# Altium PCB WiFi_Module-2-Layers.PcbDoc (part 1 of 2)
Units mil, origin at the board's own origin, x right, y up, seen from the top; angles counter-clockwise.
Board outline 2293.35 x 2499.67 mil, 2 copper layers (Top Layer, Bottom Layer); 66 components, 71 nets, 200 pads, 103 vias.
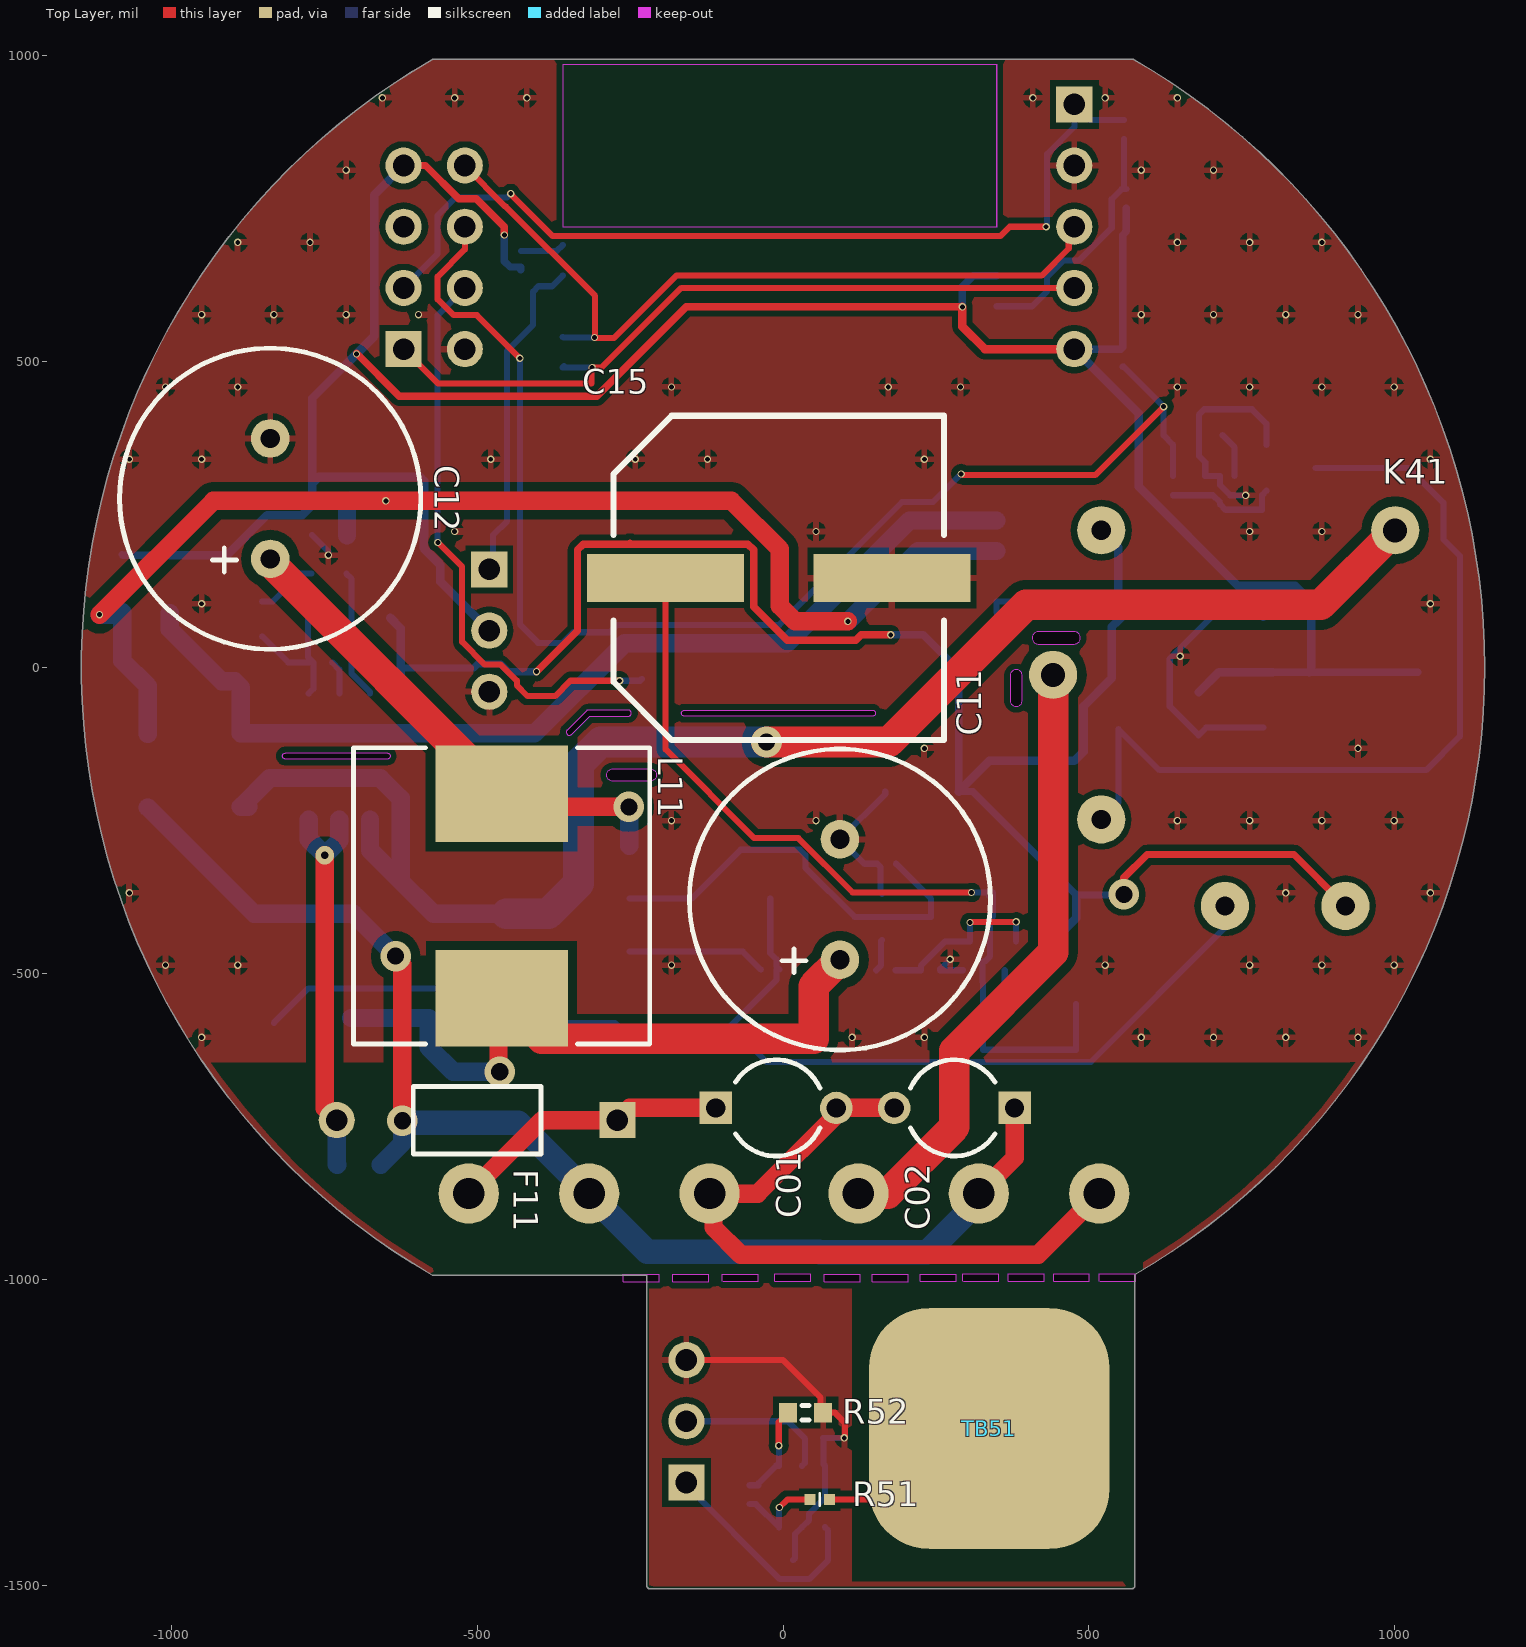
[diagram p0: Top Layer view]
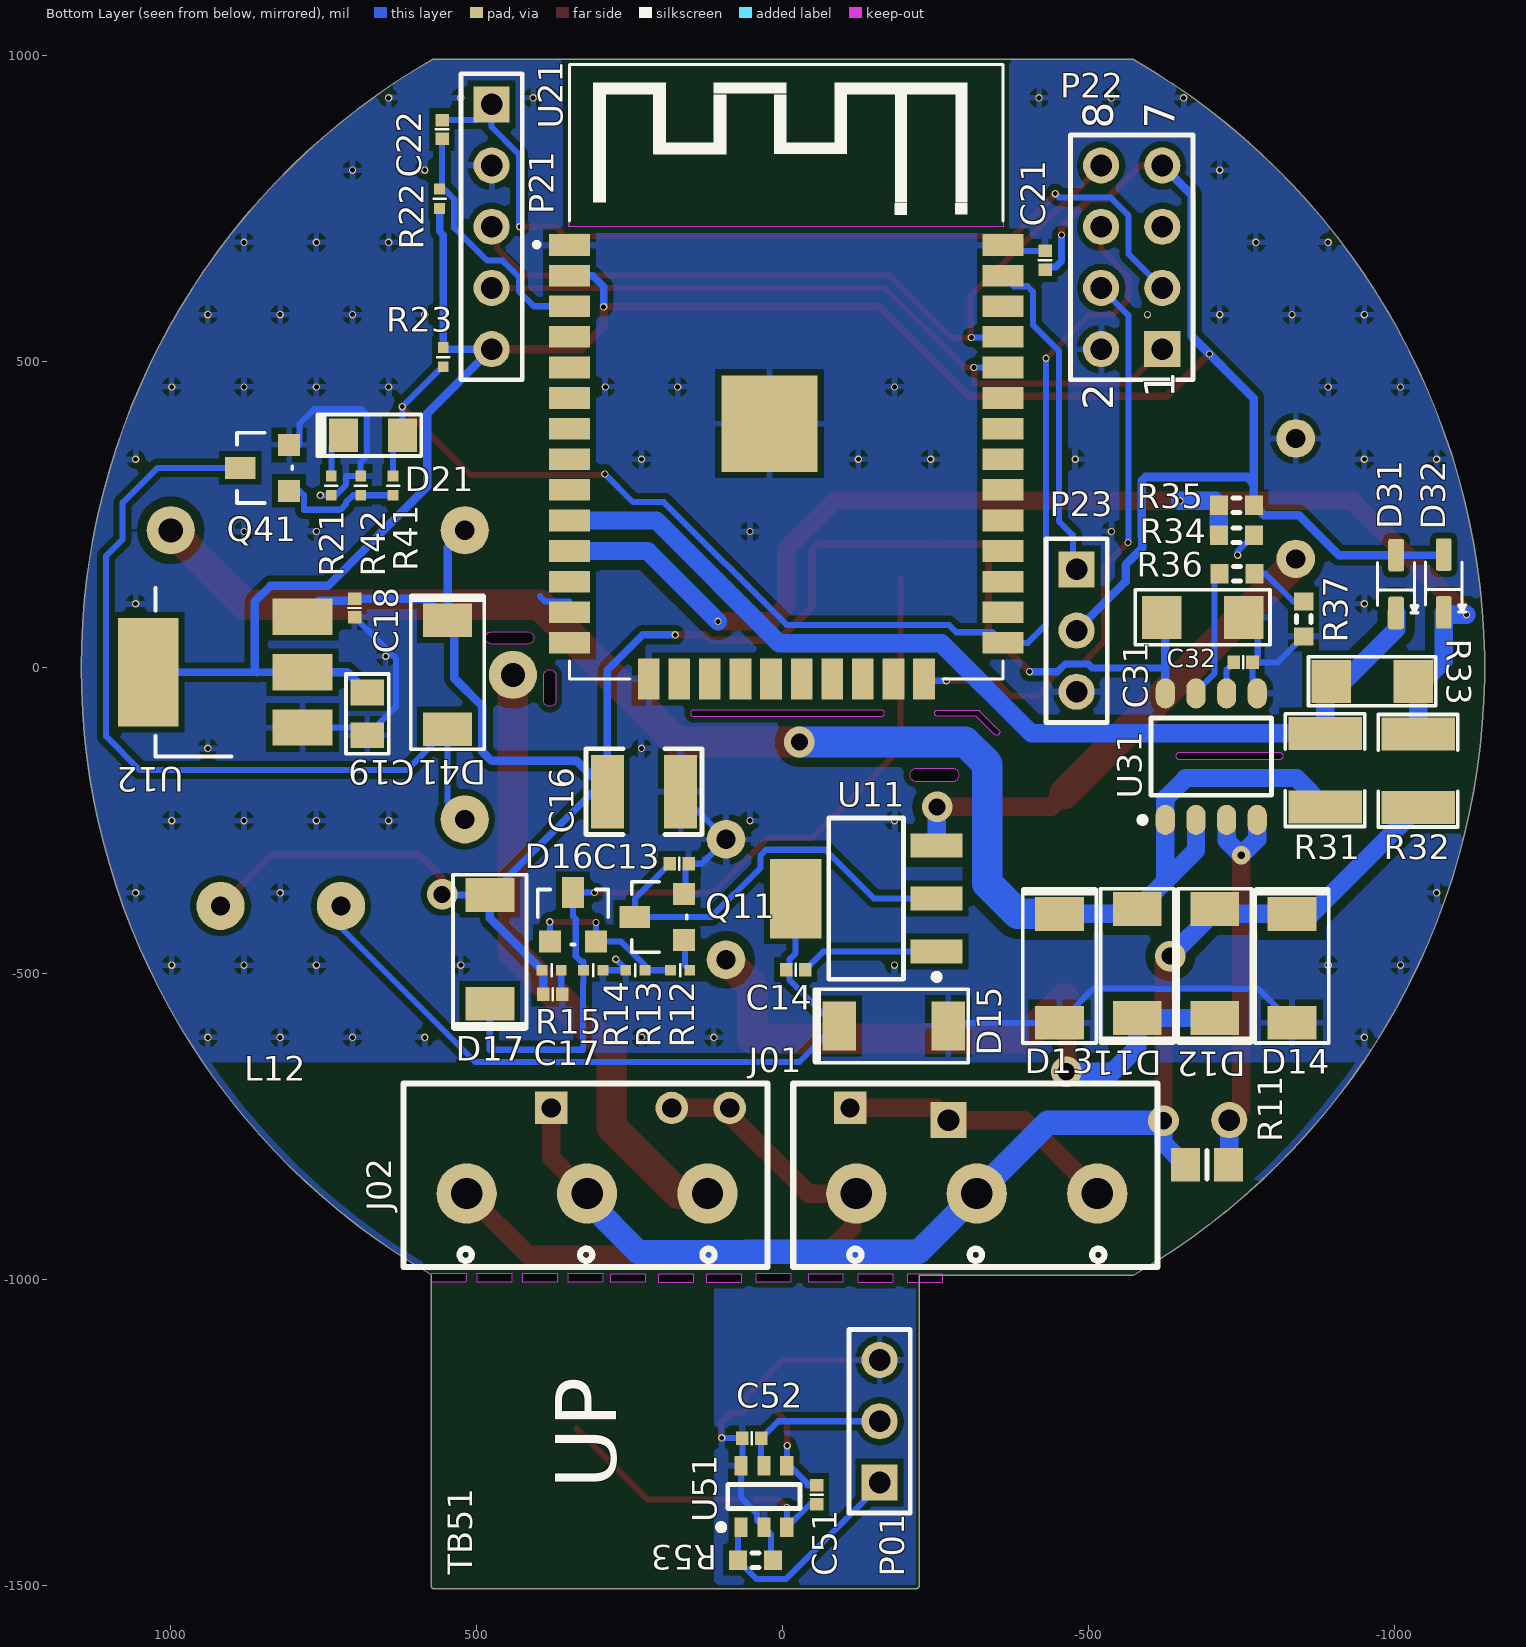
[diagram p1: Bottom Layer view, seen from below]
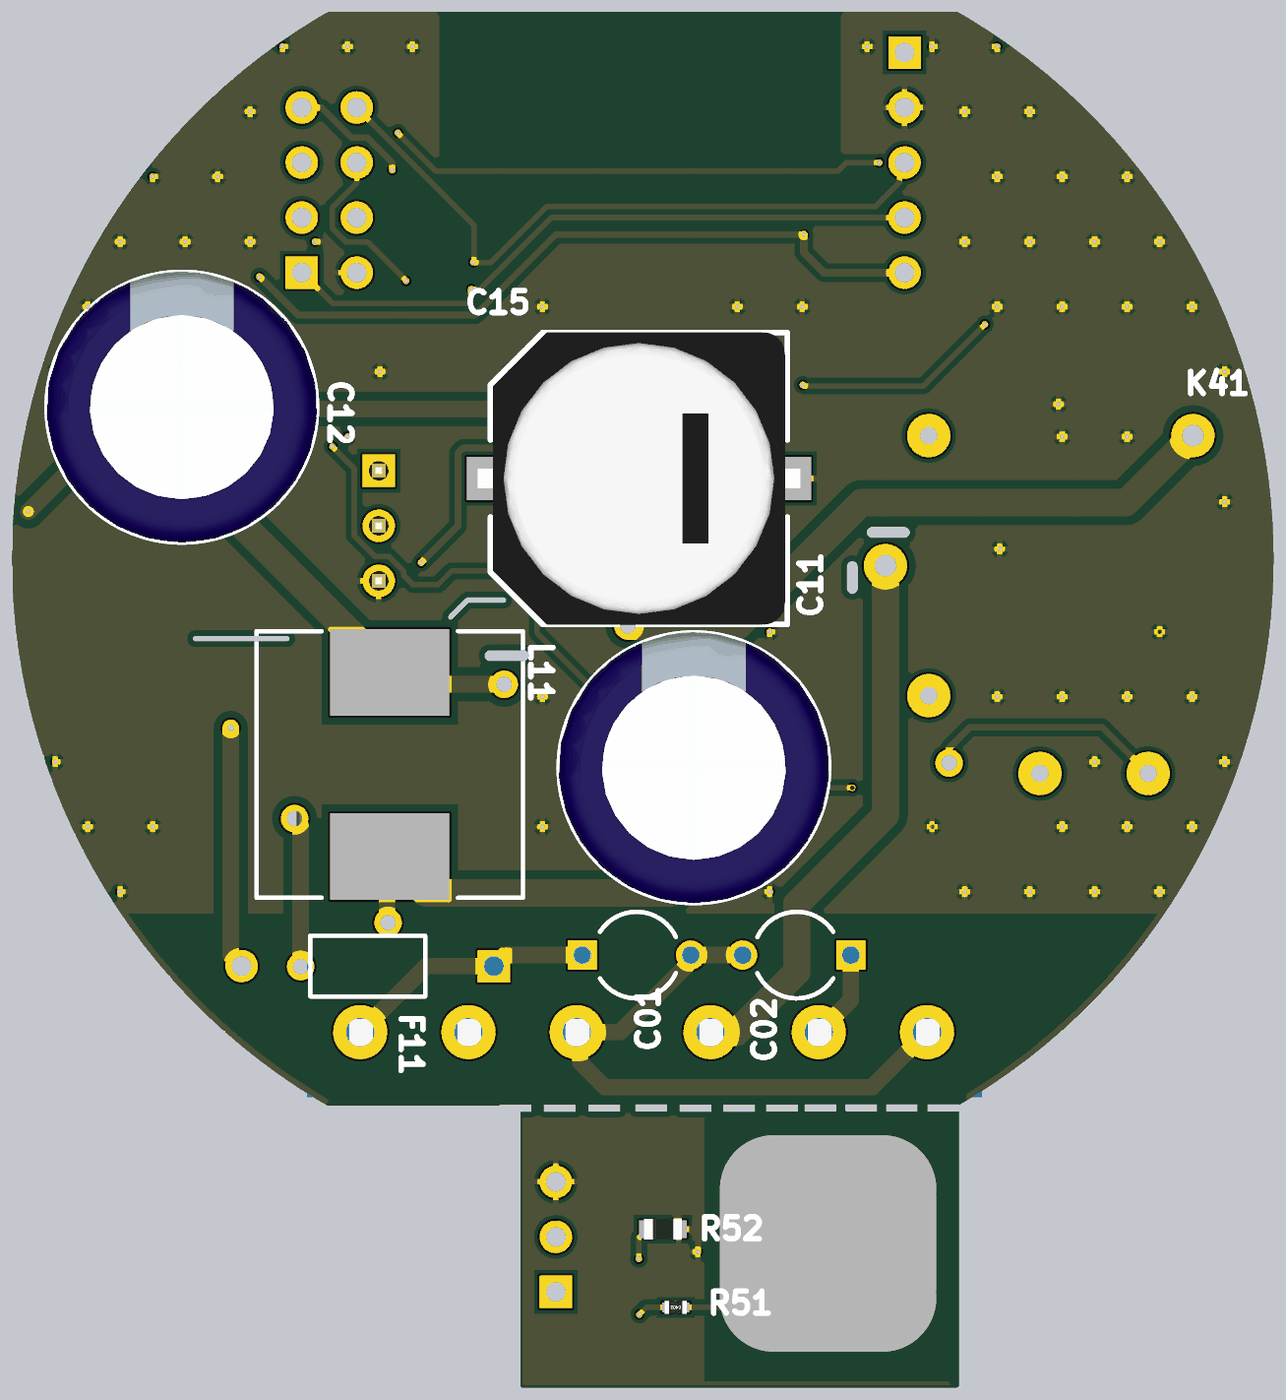
[diagram p2: 3D render of the assembled board from above, using the file's embedded part models]
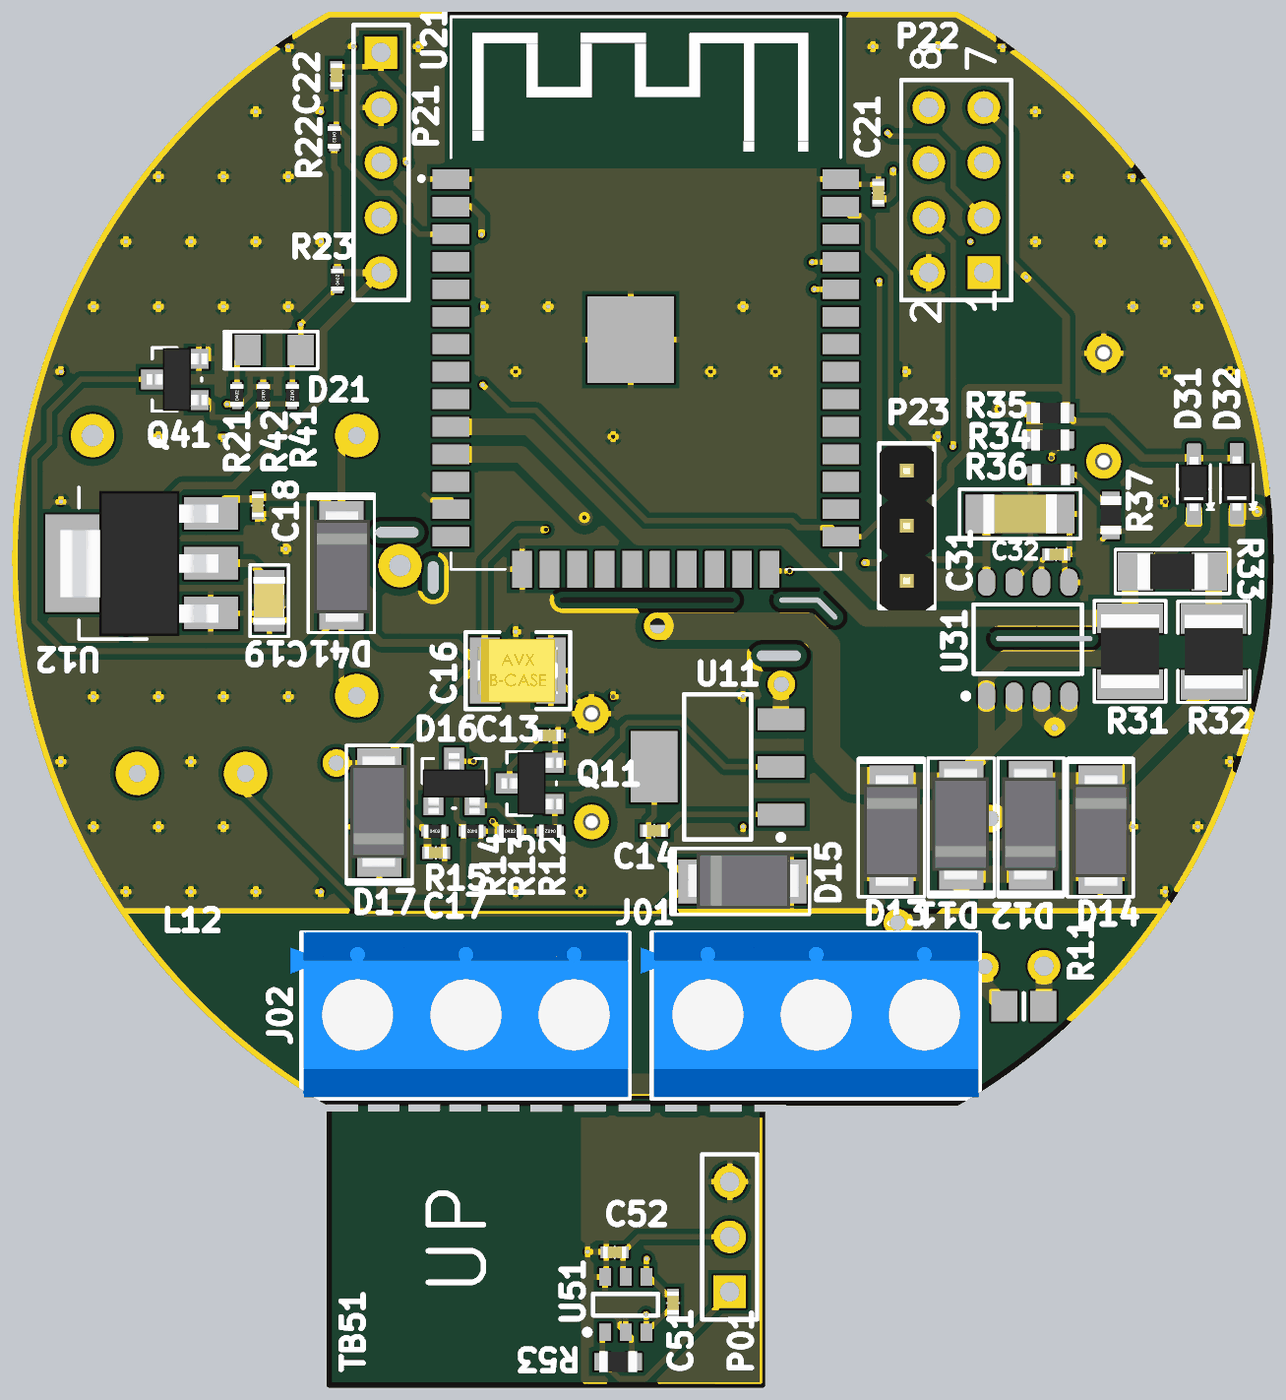
[diagram p3: 3D render of the assembled board from below, using the file's embedded part models]

## Layer stack, top to bottom
Top Solder: solder mask 0.4, Solder Resist, Dk 3.5
Top Layer: signal copper 1.4
Dielectric 1: dielectric 12.6, FR-4, Dk 4.8
Bottom Layer: signal copper 1.4
Bottom Solder: solder mask 0.4, Solder Resist, Dk 3.5

## Board outline
-573.37,-993.11 ccw(c-570.87,-988.77) -570.87,-993.78 -222.55,-993.78 -222.55,-1500.87 ccw(c-217.54,-1500.87) -217.54,-1505.88 569.87,-1505.88 ccw(c569.87,-1500.87) 574.88,-1500.87 574.88,-992.24 ccw(c0,0) 1146.75,0 ccw(c0,0) 573.37,993.11 ccw(c570.87,988.77) 570.87,993.78 -570.87,993.78 ccw(c-570.87,988.77) -573.37,993.11 ccw(c0,0)
cut-out: -352.71,-102.45 ccw(c-349.16,-106) -345.61,-109.55 -316.08,-80.01 -253,-80.01 ccw(c-253,-75) -247.99,-75 ccw(c-253,-75) -253,-69.99 -318.16,-69.99 ccw(c-318.16,-75) -321.72,-71.47 -321.71,-71.45
cut-out: -161,-80.01 cw(c-161,-75) -161,-69.99 146,-69.99 cw(c146,-75) 151.02,-75 cw(c146,-75) 146,-80.01
cut-out: 370.98,-54 ccw(c381,-54) 391.02,-54 391.02,-14 ccw(c381,-14) 370.98,-14
cut-out: 417,37.99 476,37.99 ccw(c476,48) 486.02,48 ccw(c476,48) 476,58.01 417,58.01 ccw(c417,48)
cut-out: -278,-186.01 cw(c-278,-176) -278,-165.99 -217,-165.99 cw(c-217,-176) -206.99,-176 cw(c-217,-176) -217,-186.01
cut-out: -813,-150.01 cw(c-813,-145) -813,-139.99 -647,-139.99 cw(c-647,-145) -641.99,-145 cw(c-647,-145) -647,-150.01
cut-out: -203,-1004.97 -260,-1004.97 -261,-1003.97 -261,-991.99 -203.01,-991.99 -203,-991.97
cut-out: -122,-1004.97 -179,-1004.97 -180,-1003.97 -180,-991.99 -122.01,-991.99 -122,-991.97
cut-out: -41,-1004.48 -98,-1004.48 -99,-1003.48 -99,-991.49 -41.01,-991.49 -41,-991.48
cut-out: 44.3,-1003.99 -12.7,-1003.99 -13.7,-1002.99 -13.7,-991 44.29,-991 44.3,-990.99
cut-out: 125,-1004.97 68,-1004.97 67,-1003.97 67,-991.99 124.99,-991.99 125,-991.97
cut-out: 204,-1004.97 147,-1004.97 146,-1003.97 146,-991.99 203.99,-991.99 204,-991.97
cut-out: 282,-1004.48 225,-1004.48 224,-1003.48 224,-991.49 281.99,-991.49 282,-991.48
cut-out: 352,-1003.99 295,-1003.99 294,-1002.99 294,-991.01 351.99,-991.01 352,-990.99
cut-out: 426,-1003.99 369,-1003.99 368,-1002.99 368,-991.01 425.99,-991.01 426,-990.99
cut-out: 500,-1003.99 443,-1003.99 442,-1002.99 442,-991.01 499.99,-991.01 500,-990.99
cut-out: 575.01,-1003.99 518.01,-1003.99 517.01,-1002.99 517.01,-991 574.99,-991 575.01,-990.99

## Design rules (kind name [scope] priority, off if disabled: settings)
Clearance "Schematic Clearance Constraint_4" [InNet('NetC01_2')] p1: gap=40 ignorepadtopadclearanceinfootprint=TRUE
Clearance "Schematic Clearance Constraint_3" [InNet('NetC01_2')] p2: gap=15.75 ignorepadtopadclearanceinfootprint=TRUE
Clearance "Schematic Clearance Constraint" [InNet('NetC02_1')] p3: gap=15.75 ignorepadtopadclearanceinfootprint=TRUE
Clearance "Schematic Clearance Constraint_34" [InNet('NetC01_1')] p4: gap=15.75 ignorepadtopadclearanceinfootprint=TRUE
Clearance "Schematic Clearance Constraint_33" [InNet('NetC01_2')] p5: gap=15.75 ignorepadtopadclearanceinfootprint=TRUE
Clearance "Schematic Clearance Constraint_32" [InNet('NetD12_2')] p6: gap=15.75 ignorepadtopadclearanceinfootprint=TRUE
Clearance "Schematic Clearance Constraint_31" [InNet('NetD31_1')] p7: gap=15.75 ignorepadtopadclearanceinfootprint=TRUE
Clearance "Schematic Clearance Constraint_30" [InNet('NetK41_4')] p8: gap=15.75 ignorepadtopadclearanceinfootprint=TRUE
Clearance "Schematic Clearance Constraint_29" [InNet('NetD11_2')] p9: gap=15.75 ignorepadtopadclearanceinfootprint=TRUE
Clearance "Schematic Clearance Constraint_28" [InNet('NetF11_2')] p10: gap=15.75 ignorepadtopadclearanceinfootprint=TRUE
Clearance "Schematic Clearance Constraint_27" [InNet('NetU31_3')] p11: gap=15.75 ignorepadtopadclearanceinfootprint=TRUE
Clearance "Schematic Clearance Constraint_25" [InNet('NetD32_1')] p12: gap=15.75 ignorepadtopadclearanceinfootprint=TRUE
Clearance "Schematic Clearance Constraint_14" [InNet('NetD11_2')] p13: gap=15.75 ignorepadtopadclearanceinfootprint=TRUE
Clearance "Schematic Clearance Constraint_24" [InNet('NetC12_1')] p14: gap=15.75 ignorepadtopadclearanceinfootprint=TRUE except(0: Arc-Text Track-Text SMDPad-Text THPad-Text Via-Text Fill-Text Poly-Text Region-Text Text-Text Text-Hole)
Clearance "Schematic Clearance Constraint_23" [InNet('NetD12_2')] p15: gap=15.75 ignorepadtopadclearanceinfootprint=TRUE except(0: Arc-Text Track-Text SMDPad-Text THPad-Text Via-Text Fill-Text Poly-Text Region-Text Text-Text Text-Hole)
Clearance "Schematic Clearance Constraint_22" [InNet('NetF11_2')] p16: gap=15.75 ignorepadtopadclearanceinfootprint=TRUE except(0: Arc-Text Track-Text SMDPad-Text THPad-Text Via-Text Fill-Text Poly-Text Region-Text Text-Text Text-Hole)
Clearance "Schematic Clearance Constraint_21" [InNet('GND')] p17 off: gap=15.75 ignorepadtopadclearanceinfootprint=TRUE except(0: Arc-Text Track-Text SMDPad-Text THPad-Text Via-Text Fill-Text Poly-Text Region-Text Text-Text Text-Hole)
Clearance "Schematic Clearance Constraint_20" [InNet('NetC11_1')] p18: gap=15.75 ignorepadtopadclearanceinfootprint=TRUE except(0: Arc-Text Track-Text SMDPad-Text THPad-Text Via-Text Fill-Text Poly-Text Region-Text Text-Text Text-Hole)
Clearance "Schematic Clearance Constraint_19" [InNet('NetF11_1')] p19: gap=15.75 ignorepadtopadclearanceinfootprint=TRUE except(0: Arc-Text Track-Text SMDPad-Text THPad-Text Via-Text Fill-Text Poly-Text Region-Text Text-Text Text-Hole)
Clearance "Schematic Clearance Constraint_18" [InNet('NetD12_2')] p20: gap=15.75 ignorepadtopadclearanceinfootprint=TRUE
Clearance "Schematic Clearance Constraint_17" [InNet('NetF11_1')] p21: gap=15.75 ignorepadtopadclearanceinfootprint=TRUE
Clearance "Schematic Clearance Constraint_16" [InNet('NetC12_1')] p22: gap=15.75 ignorepadtopadclearanceinfootprint=TRUE
Clearance "Schematic Clearance Constraint_15" [InNet('NetF11_2')] p23: gap=15.75 ignorepadtopadclearanceinfootprint=TRUE
Clearance "Schematic Clearance Constraint_10" [InNet('NetC11_1')] p24: gap=15.75 ignorepadtopadclearanceinfootprint=TRUE
Clearance "Schematic Clearance Constraint_13" [InNet('NetF11_1')] p25: gap=15.75 ignorepadtopadclearanceinfootprint=TRUE
Clearance "Schematic Clearance Constraint_12" [InNet('NetF11_2')] p26: gap=15.75 ignorepadtopadclearanceinfootprint=TRUE
Clearance "Schematic Clearance Constraint_11" [InNet('NetD12_2')] p27: gap=15.75 ignorepadtopadclearanceinfootprint=TRUE
Clearance "Schematic Clearance Constraint_7" [InNet('NetC11_1')] p28: gap=15.75 ignorepadtopadclearanceinfootprint=TRUE
Clearance "Schematic Clearance Constraint_9" [InNet('NetD11_2')] p29: gap=15.75 ignorepadtopadclearanceinfootprint=FALSE
Clearance "Schematic Clearance Constraint_8" [InNet('NetC11_1')] p30: gap=15.75 ignorepadtopadclearanceinfootprint=FALSE
Clearance "Schematic Clearance Constraint_1" [InNet('NetC12_1')] p31: gap=15.75 ignorepadtopadclearanceinfootprint=FALSE
Clearance "Schematic Clearance Constraint_6" [InNet('NetF11_2')] p32: gap=10 ignorepadtopadclearanceinfootprint=FALSE except(0: Arc-Hole Track-Hole SMDPad-Hole THPad-Hole Via-Hole Fill-Hole Poly-Hole Region-Hole Text-Hole; 5.12: Arc-Arc Arc-Track Track-Track)
Clearance "Schematic Clearance Constraint_5" [InNet('NetD11_2')] p33: gap=10 ignorepadtopadclearanceinfootprint=FALSE except(0: Arc-Hole Track-Hole SMDPad-Hole THPad-Hole Via-Hole Fill-Hole Poly-Hole Region-Hole Text-Hole; 5.12: Arc-Arc Arc-Track Track-Track)
Clearance [All] p34: gap=10 ignorepadtopadclearanceinfootprint=FALSE except(0: Arc-Hole Track-Hole SMDPad-Hole THPad-Hole Via-Hole Fill-Hole Poly-Hole Region-Hole Text-Hole)
PolygonConnect [All] p1: connectstyle=Relief reliefconductorwidth=10 reliefentries=4 polygonreliefangle="90 Angle" airgapwidth=10
RoomDefinition PrzyciskDotykowy_A4_Landscape_ [InComponentClass('PrzyciskDotykowy_A4_Landscape_')] p1: confinementstyle=ConfineIn formatcopy=TRUE lockcomponents=FALSE outline -226,-1513 581,-1513 581,-1004.47 -226,-1004.47
RoomDefinition PrzekaŸnik_A4_Landscape_ [InComponentClass('PrzekaŸnik_A4_Landscape_')] p2: confinementstyle=ConfineIn formatcopy=TRUE lockcomponents=FALSE outline 1140,-343 40,-343 40,320 1140,320
RoomDefinition Pomiar-Energii_A4_Landscape_ [InComponentClass('Pomiar-Energii_A4_Landscape_')] p3: confinementstyle=ConfineIn formatcopy=TRUE lockcomponents=FALSE outline -1175,-542.24 -526,-542.24 -526,577.76 -1175,577.76
RoomDefinition ESP32_A4_Landscape [InComponentClass('ESP32_A4_Landscape')] p4: confinementstyle=ConfineIn formatcopy=TRUE lockcomponents=FALSE outline -658.35,-215 661.65,-215 661.65,1005 -658.35,1005
RoomDefinition BlockSchematic [InComponentClass('BlockSchematic')] p5: confinementstyle=ConfineIn formatcopy=TRUE lockcomponents=FALSE outline -1040,-990 800,-990 800,-560 -1040,-560
RoutingVias [All] p1: holewidth=28 width=50 viastyle="Through Hole" minholewidth=28 minwidth=50 maxholewidth=28 maxwidth=50
SolderMaskExpansion [All] p1: expansion=4
Width "Schematic Width Constraint_18" [InNet('NetC01_1')] p1: maxlimit=50 minlimit=30 preferedwidth=40
Width "Schematic Width Constraint_17" [InNet('NetC01_2')] p2: maxlimit=50 minlimit=30 preferedwidth=40
Width "Schematic Width Constraint_5" [InNet('NetC02_1')] p3: maxlimit=50 minlimit=30 preferedwidth=40
Width Power [InNet('+5')] p4: maxlimit=14 minlimit=12 preferedwidth=12
Width Power_1 [InNet('3V3')] p5: maxlimit=14 minlimit=12 preferedwidth=12
Width "Schematic Width Constraint_22" [InNet('NetC01_1')] p6: maxlimit=50 minlimit=30 preferedwidth=40
Width "Schematic Width Constraint_21" [InNet('NetC01_2')] p7: maxlimit=50 minlimit=30 preferedwidth=40
Width "Schematic Width Constraint_16" [InNet('NetD12_2')] p8: maxlimit=50 minlimit=30 preferedwidth=40
Width "Schematic Width Constraint_15" [InNet('NetD11_2')] p9: maxlimit=50 minlimit=30 preferedwidth=40
Width "Schematic Width Constraint_14" [InNet('NetD11_2')] p10: maxlimit=50 minlimit=30 preferedwidth=40
Width "Schematic Width Constraint_13" [InNet('NetD32_1')] p11: maxlimit=50 minlimit=30 preferedwidth=40
Width "Schematic Width Constraint_12" [InNet('NetU31_2')] p12: maxlimit=50 minlimit=30 preferedwidth=40
Width "Schematic Width Constraint_11" [InNet('NetD31_1')] p13: maxlimit=50 minlimit=30 preferedwidth=40
Width "Schematic Width Constraint_8" [InNet('NetK41_4')] p14: maxlimit=50 minlimit=30 preferedwidth=40
Width "Schematic Width Constraint_7" [InNet('NetU31_3')] p15: maxlimit=50 minlimit=30 preferedwidth=40
Width "Schematic Width Constraint_10" [InNet('NetC11_1')] p16: maxlimit=50 minlimit=30 preferedwidth=40
Width "Schematic Width Constraint_9" [InNet('NetD11_2')] p17: maxlimit=50 minlimit=30 preferedwidth=40
Width "Schematic Width Constraint_4" [InNet('NetC12_1')] p18: maxlimit=50 minlimit=30 preferedwidth=40
Width "Schematic Width Constraint_3" [InNet('GND')] p19 off: maxlimit=50 minlimit=30 preferedwidth=40
Width "Schematic Width Constraint_2" [InNet('NetF11_2')] p20: maxlimit=50 minlimit=30 preferedwidth=40
Width "Schematic Width Constraint" [InNet('NetD12_2')] p21: maxlimit=50 minlimit=30 preferedwidth=40
Width "Schematic Width Constraint_1" [InNet('NetF11_1')] p22: maxlimit=50 minlimit=30 preferedwidth=40
Width [All] p23: maxlimit=10 minlimit=10 preferedwidth=10
30 further rules are at their usual default settings.

## Classes and differential pairs
component class BlockSchematic: C01 C02 J01 J02 P01
component class PrzyciskDotykowy_A4_Landscape_: C51 C52 R51 R52 R53 TB51 U51
component class Pomiar-Energii_A4_Landscape_: C31 C32 D31 D32 R31 R32 R33 R34 R35 R36 R37 U31
component class Zasilanie_A4_Landscape_: * C11 C12 C13 C14 C15 C16 C17 C18 C19 C? D11 D12 D13 D14 D15 D16 D17 D? F11 L11 L12 Q11 R11 R12 R13 R14 R15 R? U11 U12 U?
component class PrzekaŸnik_A4_Landscape_: D41 Q41 R41 R42
component class ESP32_A4_Landscape: C21 C22 D21 P21 P22 P23 P? R21 R22 R23 U21

## Components (designator, comment, footprint, x,y, rotation, side; value= is the part's Value field where it differs from the comment)
C01 "Cap2" CAPR5-4X5 -11.37,-720 r0 top value=10nF
C02 "Cap2" CAPR5-4X5 280,-720 r180 top value=10nF
C11 "Electrolytic Capacitor" C_12.5x25x5 93,-379.57 r90 top value=10uF
C12 "Electrolytic Capacitor" C_12.5x25x5 -838,275.57 r90 top value=10uF
C13 "Ceramic C0G" C_0402_1005 169.33,-321 r180 bottom value=1nF
C14 "Ceramic C0G" C_0402_1005 -20.84,-494 r0 bottom value=22pF
C15 "Electrolytic Capacitor" CE_D_12.5x16.5MM -7,146 r0 top value=4.7uF
C16 "Tantalum Capacitor" CT_1210_3225 227,-203 r180 bottom value=100uF
C17 "Ceramic X7R" C_0402_1005 376,-534 r180 bottom value=100nF
C18 "Ceramic X7R" C_0402_1005 700,97 r270 bottom value=100nF
C19 "Ceramic X7R" C_0805_2012 679,-76 r270 bottom value=10uF
C21 "Ceramic X7R" C_0402_1005 -428.35,665 r90 bottom value=100nF
C22 "Ceramic X7R" C_0402_1005 557,879 r270 bottom value=100nF
C31 "Ceramic C0G" C_1206_3216 -686,81.65 r180 bottom value=100nF
C32 "Ceramic C0G" C_0402_1005 -752,8 r180 bottom value=1nF
C51 "Ceramic X7R" C_0402_1005 -55,-1352 r90 bottom value=22nF
C52 "Ceramic X7R" C_0402_1005 51,-1260 r0 bottom value=100nF
D11 "S1G-E3" SMA_DO-214AC -579,-484 r90 bottom value=S1G-E3/61T
D12 "S1G-E3" SMA_DO-214AC -705.71,-484 r90 bottom value=S1G-E3/61T
D13 "S1G-E3" SMA_DO-214AC -452,-492 r270 bottom value=S1G-E3/61T
D14 "S1G-E3" SMA_DO-214AC -832,-492 r270 bottom value=S1G-E3/61T
D15 "S1G-E3" SMA_DO-214AC -181,-586 r180 bottom value=S1G-E3/61T
D16 "BZX84-C3V9" D_SOT23_TO236_SC59 343,-408 r180 bottom value="=\"Manufacturer Part Number\""
D17 "S1G-E3" SMA_DO-214AC 479,-461 r90 bottom value=S1G-E3/61T
D21 "Green led" OL_0805_2012 670,379.25 r180 bottom value=LTST-C171GKT
D31 "BAS21J" SOD323F -1002,136 r90 bottom
D32 "BAS21J" SOD323F -1080,137 r90 bottom
D41 "" SMA_DO-214AC 548,-12 r270 bottom value=S1B
F11 "Fuse 2" PIN-W2/E2.8 -500,-740 r180 top
J01 "ARK3" J_ARK3 -316.85,-860 r0 bottom value=DG301-5.0-03P-12-18A(H)
J02 "ARK3" J_ARK3 320,-860 r0 bottom value=DG301-5.0-03P-12-18A(H)
K41 "MPA_Relay" MPA_Relay 520,223.9 r0 top
L11 "MSS1260" MSS1260 -460,-373.68 r90 top
L12 "COIL1010-2.2" COIL1010-2.2 722.15,-390 r0 bottom value="2.2mH 550mA"
P01 "Header 3" HDR1X3 -158,-1332 r90 bottom
P21 "Header 5" HDR1X5 476,920 r270 bottom
P22 "Header 4X2" HDR2X4 -620,520 r90 bottom
P23 "Goldpin" P_HEADER_1x3_2.54 -480,160 r270 bottom value=DS1021-1*3SF1-1
Q11 "BC847C" SOT23_TO236_SC59 202,-408 r90 bottom value=BC847CLT1G
Q41 "BC847C" SOT23_TO236_SC59 847,326 r90 bottom value=BC847CLT1G
R11 "Res Varistor" 6-0805_N -693,-813 r180 bottom
R12 "Resistor" R_0402_1005 168,-495 r0 bottom value=100R
R13 "Resistor" R_0402_1005 241,-495 r180 bottom value=1k
R14 "Resistor" R_0402_1005 310,-495 r0 bottom value=100k
R15 "Resistor" R_0402_1005 378,-495 r180 bottom value=10k
R21 "Resistor" R_0402_1005 738,297 r90 bottom value=68R
R22 "Resistor" R_0402_1005 561,765.75 r270 bottom value=10k
R23 "Resistor" R_0402_1005 555,507 r90 bottom value=10k
R31 "Resistor" R_1210_3225 -886,-168 r90 bottom value=1M
R32 "Resistor" R_1210_3225 -1038,-169 r90 bottom value=1M
R33 "Resistor" R_1206_3216 -963,-23 r0 bottom value=10k
R34 "Resistor" R_0603_1608 -741,216 r0 bottom value=10k
R35 "Resistor" R_0603_1608 -741,265 r180 bottom value=10k
R36 "Resistor" R_0603_1608 -742,153 r180 bottom value=2k
R37 "Resistor" R_0603_1608 -851,79 r90 bottom value=1k
R41 "Resistor" R_0402_1005 637,297 r270 bottom value=1k
R42 "Resistor" R_0402_1005 690,297 r270 bottom value=10k
R51 "Resistor" R_0402_1005 60,-1360 r180 top value=22k
R52 "Resistor" R_0603_1608 37,-1218 r180 top value=1M
R53 "Resistor" R_0603_1608 45,-1459 r0 bottom value=100k
TB51 "TouchButton" TouchButton 337,-1244 r90 bottom
U11 "NCP1014" NCP1014_SOT-223 -136,-378 r0 bottom
U12 "LD1117AS33TR" SOT223_SC73 911,-8 r90 bottom
U21 "ESP-WROOM-32" *MODULE_ESP-WROOM-32_ESP-WROOM-32(Primary) -5.67,365 r180 bottom
U31 "ACS712" ACS712 -700,-146 r90 bottom
U51 "AT42QT1012" AT42QT1012 31,-1355 r90 bottom

## Footprints (in the part's own frame and the unit in brackets; to place one, negate y for a bottom-side part, rotate by r counter-clockwise, add the part's x,y. Pads: shape width x height; smd on the part's side, far side on the other; paste and mask are expansions set on the pad)
6-0805_N [mm] "Chip Resistor, Body 2.0x1.2mm, IPC Medium Density"
  rect 1.2x1.4 smd: 1(-0.9,0) 2(0.9,0)
  silkscreen extent 0,-0.6 0,0.6, body extent -1.07,-0.7 1.07,0.7, height 0.7
*MODULE_ESP-WROOM-32_ESP-WROOM-32(Primary) [mm]
  rect 1.7x0.9 smd: 1(-9,8.255) 2(-9,6.985) 3(-9,5.715) 4(-9,4.445) 5(-9,3.175) 6(-9,1.905) 7(-9,0.635) 8(-9,-0.635) 9(-9,-1.905) 10(-9,-3.175) 11(-9,-4.445) 12(-9,-5.715) 13(-9,-6.985) 14(-9,-8.255) 25(9,-8.255) 26(9,-6.985) 27(9,-5.715) 28(9,-4.445) 29(9,-3.175) 30(9,-1.905) 31(9,-0.635) 32(9,0.635) 33(9,1.905) 34(9,3.175) 35(9,4.445) 36(9,5.715) 37(9,6.985) 38(9,8.255)
  rect 4x4 smd: 1.1(-0.7,0.845)
  rect 0.9x1.7 smd: 15(-5.715,-9.755) 16(-4.445,-9.755) 17(-3.175,-9.755) 18(-1.905,-9.755) 19(-0.635,-9.755) 20(0.635,-9.755) 21(1.905,-9.755) 22(3.175,-9.755) 23(4.445,-9.755) 24(5.715,-9.755)
  Keep-Out Layer region: -9.026,15.75 9,15.75 9,9.026 -9.026,9.026
  Keep-Out Layer region: -9.012,15.75 9,15.75 9,9.012 -9.012,9.012
  Keep-Out Layer region: -9.024,15.75 9,15.75 9,9.024 -9.024,9.024
  Keep-Out Layer region: -9.026,15.75 9,15.75 9,9.026 -9.026,9.026
  Keep-Out Layer region: -9.012,15.75 9,15.75 9,9.012 -9.012,9.012
  Keep-Out Layer region: -9.024,15.75 9,15.75 9,9.024 -9.024,9.024
  Keep-Out Layer region: -9.026,15.75 9,15.75 9,9.026 -9.026,9.026
  Keep-Out Layer region: -9.012,15.75 9,15.75 9,9.012 -9.012,9.012
  Keep-Out Layer region: -9.024,15.75 9,15.75 9,9.024 -9.024,9.024
  silkscreen extent -10.47,-9.75 9,15.75
ACS712 [mm] "SOIC, 8-Leads, Body 4,90x3,90mm, Pitch 1,27mm, Thermal Pad 2,50x2,00mm, IPC High Density"
  oval 1.25x0.8 smd: 1(-2.625,1.905) 2(-2.625,0.635) 3(-2.625,-0.635) 4(-2.625,-1.905) 5(2.625,-1.905) 6(2.625,-0.635) 7(2.625,0.635) 8(2.625,1.905)
  silkscreen extent -2.75,-2.5 1.6,2.98, body extent -2,-2.46 2,2.54, height 1.75
AT42QT1012 [mm] "SOT23, 6-Leads, Body 2,90x2,80mm, Pitch 0,95mm, IPC High Density"
  rect 0.8x0.55 smd: 1(-1.275,0.95) 2(-1.275,0) 3(-1.275,-0.95) 4(1.275,-0.95) 5(1.275,0) 6(1.275,0.95)
  silkscreen extent -1.4,-1.5 0.5,1.9, body extent -0.88,-1.5 0.87,1.5, height 1.45
C_12.5x25x5 [mm]
  round 1.6 hole 0.8: 1(-2.5,0) 2(2.5,0)
  silkscreen extent -6.25,-6.25 6.25,6.25, body extent -6.25,-6.25 6.25,6.25, height 25.5
C_0402_1005 [mm]
  rect 0.52x0.56 smd: 1(-0.39,0) 2(0.39,0)
  silkscreen extent 0,-0.25 0,0.25, body extent -0.52,-0.27 0.53,0.28, height 0.55
C_0805_2012 [mil]
  rect 42x55 smd: 1(-35,0) 2(35,0)
  silkscreen extent -65,-35 65,35, body extent -43,-29 43,29, height 53
C_1206_3216 [mil]
  rect 64x70 smd: 1(-67,0) 2(67,0)
  silkscreen extent -110,-45 110,45, body extent -67,-35 67,35, height 39
CAPR5-4X5 [mm] "Capacitor; 2 Leads"
  rect 1.35x1.35 hole 0.8: 1(-2.5,0)
  round 1.35 hole 0.8: 2(2.5,0)
  silkscreen extent -1.69,-2 1.82,2
CE_D_12.5x16.5MM [mm]
  rect 6.5x2 smd: 1(-4.7,0) 2(4.7,0)
  silkscreen extent -6.86,-6.73 6.86,6.73, body extent -7.45,-6.75 7.45,6.75, height 16.5
COIL1010-2.2 [mm]
  round 2 hole 0.8: 1(0,0) 2(5,0)
CT_1210_3225 [mil]
  rect 54x120 smd: 1(-60,0) 2(60,0)
  silkscreen extent -95,-70 95,70, body extent -73,-58 73,58, height 80
D_SOT23_TO236_SC59 [mil]
  rect 36x50 smd: 1(0,40)
  rect 36x36 smd: 2(-37.5,-40) 2(37.5,-40)
  silkscreen extent -57,-45 58,45, body extent -57,-55 57,55, height 51
HDR1X3 [mm] "Connector; Header; 3 Position"
  rect 1.5x1.5 hole 0.9: 1(0,0)
  round 1.5 hole 0.9: 2(2.54,0) 3(5.08,0)
  silkscreen extent -1.27,-1.27 6.35,1.27
HDR1X5 [mm] "Connector; Header; 5 Position"
  rect 1.5x1.5 hole 0.9: 1(0,0)
  round 1.5 hole 0.9: 2(2.54,0) 3(5.08,0) 4(7.62,0) 5(10.16,0)
  silkscreen extent -1.27,-1.27 11.43,1.27
HDR2X4 [mm] "Connector; Header; 4x2 Position"
  rect 1.5x1.5 hole 0.9: 1(0,0)
  round 1.5 hole 0.9: 2(0,2.54) 3(2.54,0) 4(2.54,2.54) 5(5.08,0) 6(5.08,2.54) 7(7.62,0) 8(7.62,2.54)
  silkscreen extent -1.27,-1.27 8.89,3.81
J_ARK3 [mm]
  round 2.5 hole 1.3: 1(-5,0) 2(0,0) 3(5,0)
  silkscreen extent -7.49,-4.57 7.62,3.05, body extent -7.46,-4.6 8.14,3, height 10.05
MPA_Relay [mm]
  round 2 hole 0.8: 1(0,0) 2(0,-12)
  round 2 hole 1: 3(12.2,0) 4(-2,-6)
MSS1260 [mm] "Precision Wire Wound Inductor, 2-Leads, Body 12,00x12,00mm, IPC High Density"
  rect 4x5.5 smd: 1(-4.25,0) 2(4.25,0)
  silkscreen extent -6.15,-6.15 6.15,6.15, body extent -6.15,-6.15 6.15,6.15, height 6.2
NCP1014_SOT-223 [mm] "SOT223, 4-Leads, Body 6,50x7,00mm (avg), Pitch 2,20mm, IPC Medium Density"
  rect 2.15x1 smd: 1(-2.925,2.2) 2(-2.925,0) 3(-2.925,-2.2)
  rect 2.15x3.3 smd: 4(2.925,0)
  silkscreen extent -3.05,-3.35 1.55,3.37, body extent -1.85,-3.35 1.85,3.35, height 1.75
OL_0805_2012 [mm]
  rect 1.2x1.4 smd: 1(-1.225,0) 2(1.225,0)
  silkscreen extent -2.38,-0.86 2.01,0.86, body extent -1,-0.62 1,0.63, height 0.8
P_HEADER_1x3_2.54 [mm] "Connector; Header; 3 Position, Male"
  rect 1.5x1.5 hole 0.9: 1(0,0)
  round 1.5 hole 0.9: 2(2.54,0) 3(5.08,0)
  silkscreen extent -1.27,-1.27 6.35,1.27, body extent -1.17,-1.25 6.45,1.25, height 8.2
PIN-W2/E2.8 [mm] "Thru-Hole; 2 Leads"
  rect 1.5x1.5 hole 0.9: 1(-5.825,0)
  round 1.5 hole 0.9: 2(5.825,0)
  silkscreen extent -2.65,-1.4 2.65,1.4
R_0402_1005 [mm]
  rect 0.45x0.45 smd: 1(-0.4,0) 2(0.4,0)
  silkscreen extent 0,-0.25 0,0.25, body extent -0.52,-0.3 0.52,0.3, height 0.34
R_0603_1608 [mm]
  rect 0.75x0.8 smd: 1(-0.725,0) 2(0.725,0)
  silkscreen extent -0.15,-0.3 0.15,0.3, body extent -0.87,-0.47 0.88,0.48, height 0.54
R_1206_3216 [mil]
  rect 64x70 smd: 1(-67,0) 2(67,0)
  silkscreen extent -104,-40 104,40, body extent -64,-32 64,32, height 27
R_1210_3225 [mil]
  rect 54x120 smd: 1(-60,0) 2(60,0)
  silkscreen extent -92,-65 92,65, body extent -67,-53 67,53, height 27
SMA_DO-214AC [mil]
  rect 55x80 smd: 1(-89,0) 2(89,0)
  silkscreen extent -133,-60 122,60, body extent -100,-50 104,52, height 95
SOD323F [mm]
  rrect25% 1.35x0.65 smd: 1(-1.2,0) 2(1.2,0)
  silkscreen extent -1.19,-0.91 0.89,0.76, body extent -1.25,-0.67 1.25,0.68, height 1
SOT23_TO236_SC59 [mil]
  rect 36x36 smd: 1(-37.5,-40) 2(37.5,-40)
  rect 36x50 smd: 3(0,40)
  silkscreen extent -57,-45 58,45, body extent -57,-55 57,55, height 51
SOT223_SC73 [mm]
  rect 1.5x2.5 smd: 1(-2.3,-3.2) 2(0,-3.2) 3(2.3,-3.2)
  rect 4.5x2.5 smd: 4(0,3.2)
  silkscreen extent -3.5,-0.25 3.5,2.9, body extent -3.36,-3.55 3.34,3.75, height 1.8
TouchButton [mm]
  rrect50% 10x10 smd far side paste+0 mask-5: 1(0,0)
  Top Layer pour cut-out: -6.35,5.715 -6.35,-5.715 6.35,-5.715 6.35,5.715
  Bottom Layer pour cut-out: -6.35,5.715 -6.35,-5.715 6.35,-5.715 6.35,5.715

## Part data
C01 C02: "Capacitor", PackageDescription="Capacitor; 2 Leads", PackageReference=CAPR5-4X5, Published=23-Sep-2002, Publisher="Altium Limited"
C11 C12: library part CE_15uF_450V_12.5x25x5_20, "Polarized Capacitor", Dielectric=AL2O3, Manufacturer=Nichicon, Manufacturer Part Number=UCS2W150MHD, Tolerance (%)=20, Voltage=450V, HelpURL=http://www.tme.eu/pl/Document/7efb657cbecf7a47c65caa99b85d4c4b/e-cs.pdf, Part Number=CE_15uF_450V_12.5x25x5_20, SCH_Footprint=R12.5x25x5, Supplier 1=TME, Supplier 2="RS Components", Supplier 3=Farnell, Supplier 4=Mouser, Supplier 5=Digi-Key, Supplier Part Number 1=UCS2W150MHD
C13 C32: library part C_1nF_50V_C0G_0402_5, "Capacitor", Dielectric=C0G, Manufacturer=Murata, Manufacturer Part Number=GRM1555C1H102JA01D, Tolerance (%)=5, Voltage=50V, HelpURL=http://www.tme.eu/en/Document/e3e731e59cc68b1ab6d46b158bb05733/MURATA_GRM.pdf, Part Number=C_1nF_50V_C0G_0402_5, SCH_Footprint=0402, Supplier 1=TME, Supplier 2="RS Components", Supplier 3=Farnell, Supplier 4=Mouser, Supplier 5=Digi-Key, Supplier Part Number 1=GRM1555C1H102JA01D, Supplier Part Number 2=6242913, Supplier Part Number 3=2408520, Supplier Part Number 4=81-GRM1555C1H102JA1D, Supplier Part Number 5=490-3244-1-ND
C14: library part C_22pF_50V_C0G_0402_5, "Capacitor", Dielectric=C0G, Manufacturer=AVX, Manufacturer Part Number=04025A220JAT2A, Tolerance (%)=5, Voltage=50V, HelpURL=http://datasheet.octopart.com/04025A220JAT2A-AVX-datasheet-9883399.pdf, Part Number=C_22pF_50V_C0G_0402_5, SCH_Footprint=0402, Supplier 1=TME, Supplier 2="RS Components", Supplier 3=Farnell, Supplier 4=Mouser, Supplier 5=Digi-Key, Supplier Part Number 1=04025A220JAT2A, Supplier Part Number 2=6983087, Supplier Part Number 3=2280776, Supplier Part Number 4=581-04025A220J, Supplier Part Number 5=478-1074-1-ND
C15: library part CE_470uF_50V_Polymer_12.5x16.5_20, "Polarized Capacitor", Dielectric=Polymer, Manufacturer="United Chemi-Con", Manufacturer Part Number=EMVA500ARA471MKG5S, Tolerance (%)=20, Voltage=50V, HelpURL=https://datasheet.octopart.com/EMVA500ARA471MKG5S-United-Chemi-Con-datasheet-15540548.pdf, Part Number=CE_470uF_50V_Polymer_12.5x16.5_20, SCH_Footprint=12.5x16.5, Supplier 1=TME, Supplier 2="RS Components", Supplier 3=Farnell, Supplier 4=Mouser, Supplier 5=Digi-Key, Supplier Part Number 3=2842044, Supplier Part Number 4=661-EMVA500ARA471MKG, Supplier Part Number 5=565-2136-1-ND
C16: library part CT_100uF_10V_TA2O5_1210_20, "Capacitor", Dielectric=TA2O5, Manufacturer=AVX, Manufacturer Part Number=TAJB107M010RNJ, Supplier Part Number 1=TAJB107M010R, Tolerance (%)=20, Voltage=10V, HelpURL=https://datasheet.octopart.com/TAJB107M010RNJ-AVX-datasheet-12511273.pdf, Part Number=CT_100uF_10V_TA2O5_1210_20, SCH_Footprint=1210, Supplier 1=TME, Supplier 2="RS Components", Supplier 3=Farnell, Supplier 4=Mouser, Supplier 5=Digi-Key, Supplier Part Number 2=1360118, Supplier Part Number 3=1658150, Supplier Part Number 4=581-TAJB107M010R, Supplier Part Number 5=478-5801-1-ND
C17 C21 C52: library part C_100nF_50V_X7R_0402_10, "Capacitor", Dielectric=X7R, Manufacturer=Murata, Manufacturer Part Number=GRM155R71H104KE14D, Tolerance (%)=10, Voltage=50V, HelpURL=http://docs-europe.electrocomponents.com/webdocs/145f/0900766b8145f9d2.pdf, Part Number=C_100nF_50V_X7R_0402_10, SCH_Footprint=0402, Supplier 1=TME, Supplier 2="RS Components", Supplier 3=Farnell, Supplier 4=Mouser, Supplier 5=Digi-Key, Supplier Part Number 1=GRM155R71H104KE14D, Supplier Part Number 2=8847087, Supplier Part Number 3=2611912, Supplier Part Number 4=81-GRM155R71H104KE4D, Supplier Part Number 5=490-10700-1-ND
C18 C22: library part C_100nF_16V_X7R_0402_10, "Capacitor", Dielectric=X7R, Manufacturer=Murata, Manufacturer Part Number=GRM155R71C104KA88D, Tolerance (%)=10, Voltage=16V, HelpURL=https://www.mouser.com/ds/2/281/c02e-2905.pdf, Part Number=C_100nF_16V_X7R_0402_10, SCH_Footprint=0402, Supplier 1=TME, Supplier 2="RS Components", Supplier 3=Farnell, Supplier 4=Mouser, Supplier 5=Digi-Key, Supplier Part Number 4=81-GRM155R71C104KA88
C19: library part C_10uF_10V_X7R_0805_10, "Capacitor", Dielectric=X7R, Manufacturer="Samsung Electro-Mechanics", Manufacturer Part Number=CL21B106KPQNNNG, Tolerance (%)=10, Voltage=10V, HelpURL=http://www.tme.eu/pl/Document/4a42202b32dab16128fe107dd69598cc/samsung-chip-cap.pdf, Part Number=C_10uF_10V_X7R_0805_10, SCH_Footprint=0805, Supplier 1=TME, Supplier 2="RS Components", Supplier 3=Farnell, Supplier 4=Mouser, Supplier 5=Digi-Key, Supplier Part Number 1=CL21B106KPQNNNG
C31: library part C_100nF_50V_C0G_1206_5, "Capacitor", Dielectric=C0G, Manufacturer=Walsin, Manufacturer Part Number=1206N104J500, Tolerance (%)=5, Voltage=50V, HelpURL=http://www.tme.eu/pl/Document/b889b06af04308cca2dc1b1bfdff29a5/Middle_and_High_Voltage_DS.pdf, Part Number=C_100nF_50V_C0G_1206_5, SCH_Footprint=1206, Supplier 1=TME, Supplier 2="RS Components", Supplier 3=Farnell, Supplier 4=Mouser, Supplier 5=Digi-Key, Supplier Part Number 1=1206N104J500
C51: library part C_22nF_16V_X7R_0402_10, "Capacitor", Dielectric=X7R, Manufacturer=AVX, Manufacturer Part Number=0402YC223KAT2A, Tolerance (%)=10, Voltage=16V, HelpURL=http://datasheet.octopart.com/0402YC223KAT2A-AVX-datasheet-78690206.pdf, Part Number=C_22nF_16V_X7R_0402_10, SCH_Footprint=0402, Supplier 1=TME, Supplier 2="RS Components", Supplier 3=Farnell, Supplier 4=Mouser, Supplier 5=Digi-Key, Supplier Part Number 1=0402YC223KAT2A, Supplier Part Number 2=6983188, Supplier Part Number 3=2280808, Supplier Part Number 4=581-0402YC223K, Supplier Part Number 5=478-1118-1-ND
D11 D12 D13 D14 D15 D17: library part D_S1GE3/61T_1A_400V_SMA, Current=1A, Manufacturer=Vishay, Manufacturer Part Number=S1G-E3/61T, Voltage=400V, HelpURL=https://www.verical.com/datasheet/vishay-rectifier-s1be3-61t-768273.pdf, Part Number=D_S1GE3/61T_1A_400V_SMA, SCH_Footprint=SMA, Supplier 1=TME, Supplier 2="RS Components", Supplier 3=Farnell, Supplier 4=Mouser, Supplier 5=Digi-Key, Supplier Part Number 1=S1G-E3/61T, Supplier Part Number 2=7001243, Supplier Part Number 3=1837206, Supplier Part Number 4=625-S1G-E3, Supplier Part Number 5=S1G-E3/61TGICT-ND
D16: library part DZ_3V9-SOT23, "Zener", Voltage=3.9V, Part Number=DZ_3V9-SOT23, SCH_Footprint=SOT23, Supplier 1=TME, Supplier 2="RS Components", Supplier 3=Farnell, Supplier 4=Mouser, Supplier 5=Digi-Key
D21: library part OL_G_0805_0C006_LTST-C171GKT, "LED GREEN", Manufacturer=Lite-On, Manufacturer Part Number=LTST-C171GKT, HelpURL=http://datasheet.octopart.com/LTST-C171GKT-Lite-On-datasheet-158474.pdf, Part Number=OL_G_0805_0C006_LTST-C171GKT, SCH_Footprint=0805, Supplier 1=TME, Supplier 2="RS Components", Supplier 3=Farnell, Supplier 4=Mouser, Supplier 5=Digi-Key, Supplier Part Number 1=LTST-C171GKT, Supplier Part Number 2=6920935, Supplier Part Number 4=859-LTST-C171GKT, Supplier Part Number 5=160-1423-1-ND
D31 D32: library part D_BAS21J_0A25_300V_SOD323F, Current=0.25A, Manufacturer=nexperia, Supplier Part Number 1=BAS21J.115, Voltage=300V, HelpURL=http://www.farnell.com/datasheets/1383268.pdf, Manufacturer Part Number=BAS21J, Part Number=D_BAS21J_0A25_300V_SOD323F, SCH_Footprint=SOD323F, Supplier 1=TME, Supplier 2="RS Components", Supplier 3=Farnell, Supplier 4=Mouser, Supplier 5=Digi-Key, Supplier Part Number 3=1907600, Supplier Part Number 4=771-BAS21J115, Supplier Part Number 5=1727-4799-1-ND
D41: library part D_S1B_1A_100V_SMA, Current=1A, Manufacturer="Vishay/General Semiconductor", Manufacturer Part Number=S1B, Voltage=100V, Part Number=D_S1B_1A_100V_SMA, SCH_Footprint=SMA, Supplier 1=TME, Supplier 2="RS Components", Supplier 3=Farnell, Supplier 4=Mouser, Supplier 5=Digi-Key, Supplier Part Number 4=821-S1B, Supplier Part Number 5=S1B/51GI
F11: "Fuse", LatestRevisionDate=17-Jul-2002, LatestRevisionNote="Re-released for DXP Platform.", PackageDescription="Thru-Hole; 2 Leads", PackageReference=PIN-W2/E2.8, Published=8-Jun-2000, Publisher="Altium Limited"
J01 J02: library part J_TB-5.0-P-3P, "ARK Screw terminal, 3-Pin", Manufacturer="DEGSON ELECTRONICS", Manufacturer Part Number=DG301-5.0-03P-12-18A(H), Supplier Part Number 1=DG301-5.0-3/6B, Component Type=Standard, HelpURL=https://datasheet.octopart.com/DG301-5.0-03P-12-18A%28H%29-Degson-datasheet-17801202.pdf, Part Number=J_TB-5.0-P-3P, SCH_Footprint=ARK3, Supplier 1=TME, Supplier 2="RS Components", Supplier 3=Farnell, Supplier 4=Mouser, Supplier 5=Digi-Key
P01: "Header, 3-Pin", LatestRevisionDate=17-Jul-2002, LatestRevisionNote="Re-released for DXP Platform.", Publisher="Altium Limited"
P21: "Header, 5-Pin", LatestRevisionDate=17-Jul-2002, LatestRevisionNote="Re-released for DXP Platform.", Publisher="Altium Limited"
P22: "Header, 4-Pin, Dual row", LatestRevisionDate=17-Jul-2002, LatestRevisionNote="Re-released for DXP Platform.", Publisher="Altium Limited"
P23: library part P_HEADER_1x3_2.54, "Header, 3-Pin", Manufacturer=Connfly, Manufacturer Part Number=DS1021-1*3SF1-1, Supplier Part Number 1=ZL201-03G, Component Type=Standard, HelpURL=http://www.tme.eu/en/Document/cc301e58a5da78cb543a94b5a5b7f06a/DS1021.pdf, Part Number=P_HEADER_1x3_2.54, SCH_Footprint="1x3 2.54mm", Supplier 1=TME, Supplier 2="RS Components", Supplier 3=Farnell, Supplier 4=Mouser, Supplier 5=Digi-Key
Q11 Q41: library part QNP_BC847C_45V_0A1, Current=0A1, Manufacturer="ON Semiconductor", Manufacturer Part Number=BC847CLT1G, Voltage=45V, HelpURL=https://assets.nexperia.com/documents/data-sheet/BC847_SER.pdf, Part Number=QNP_BC847C_45V_0A1, SCH_Footprint=SOT23, Supplier 1=TME, Supplier 2="RS Components", Supplier 3=Farnell, Supplier 4=Mouser, Supplier 5=Digi-Key, Supplier Part Number 1=BC847CLT1G, Supplier Part Number 5=BC847CLT1GOSCT-ND, Type=NPN
R11: "Varistor (Voltage-Sensitive Resistor)", Code_IPC=RESC2012, LatestRevisionDate=29-May-2009, LatestRevisionNote="IPC-7351 Footprint Added.", PackageDescription="Chip Resistor 0805 Case Size", PackageReference=6-0805, PackageVersion=Mar-2003, Published=24-Mar-1999, Publisher="Altium Limited"
R12: library part R_100R_0402_1, Manufacturer=Vishay, Manufacturer Part Number=CRCW0402100RFKTDBC, Power=63mW, Tolerance=1%, Voltage=50V, HelpURL=http://www.tme.eu/pl/Document/f9483914239ddfe8619d910f45cc0572/crcw0402_dbc.pdf, Part Number=R_100R_0402_1, SCH_Footprint=0402, Supplier 1=TME, Supplier 2="RS Components", Supplier 3=Farnell, Supplier 4=Mouser, Supplier 5=Digi-Key, Supplier Part Number 1=CRCW0402100RFKTDBC
R13 R41: library part R_1k_0402, Manufacturer=Yageo, Manufacturer Part Number=RC0402FR-071K, Power=63mW, Tolerance=1%, Voltage=50V, HelpURL=http://www.tme.eu/pl/Document/1a2bc76e2be68b3b1670068306778ce6/rc0402yageo.pdf, Part Number=R_1k_0402, SCH_Footprint=0402, Supplier 1=TME, Supplier 2="RS Components", Supplier 3=Farnell, Supplier 4=Mouser, Supplier 5=Digi-Key, Supplier Part Number 1=RC0402FR-071K
R14: library part R_100k_0402_1, Manufacturer=Yageo, Manufacturer Part Number=RC0402FR-07100KL, Power=63mW, Supplier Part Number 1=RC0402FR-07100K, Tolerance=1%, Voltage=50V, HelpURL=http://www.tme.eu/pl/Document/1a2bc76e2be68b3b1670068306778ce6/rc0402yageo.pdf, Part Number=R_100k_0402_1, SCH_Footprint=0402, Supplier 1=TME, Supplier 2="RS Components", Supplier 3=Farnell, Supplier 4=Mouser, Supplier 5=Digi-Key, Supplier Part Number 3=2131798, Supplier Part Number 4=603-RC0402FR-07100KL, Supplier Part Number 5=311-100KLRCT-ND
R15 R22 R23 R42: library part R_10k_0402_1, Manufacturer=Yageo, Manufacturer Part Number=RC0402FR-0710KL, Power=63mW, Supplier Part Number 1=RC0402FR-0710K, Tolerance=1%, Voltage=50V, HelpURL=http://www.tme.eu/pl/Document/1a2bc76e2be68b3b1670068306778ce6/rc0402yageo.pdf, Part Number=R_10k_0402_1, SCH_Footprint=0402, Supplier 1=TME, Supplier 2="RS Components", Supplier 3=Farnell, Supplier 4=Mouser, Supplier 5=Digi-Key
R21: library part R_68R_0402, Manufacturer=Yageo, Manufacturer Part Number=RC0402FR-0768RL, Power=63mW, Tolerance=1%, Voltage=50V, HelpURL=http://datasheet.octopart.com/RC0402FR-0768RL-Yageo-datasheet-8324527.pdf, Part Number=R_68R_0402, SCH_Footprint=0402, Supplier 1=TME, Supplier 2="RS Components", Supplier 3=Farnell, Supplier 4=Mouser, Supplier 5=Digi-Key, Supplier Part Number 3=9239090, Supplier Part Number 4=603-RC0402FR-0768RL, Supplier Part Number 5=311-68.0LRCT-ND
R31 R32: library part R_1M_1210_1, Manufacturer=Panasonic, Manufacturer Part Number=ERJ-14NF1004U, Power=500mW, Tolerance=1%, Voltage=200V, HelpURL=http://www.farnell.com/datasheets/1911175.pdf?_ga=2.207341461.740974696.1547129502-1379097396.1542296996&_gac=1.259826424.1547131642.CjwKCAiA99vhBRBnEiwAwpk-uF9FH0QOBtmnC0R25qOd4MzGcDpshEvSsyyBD6uWM-Xs8IEw4YE-8RoCRw0QAvD_BwE, Part Number=R_1M_1210_1, SCH_Footprint=1210, Supplier 1=TME, Supplier 2="RS Components", Supplier 3=Farnell, Supplier 4=Mouser, Supplier 5=Digi-Key, Supplier Part Number 3=2323882, Supplier Part Number 4=667-ERJ-14NF1004U, Supplier Part Number 5=P1.00MAACT-ND
R33: library part R_10k_1206_1, Manufacturer=Royalohm, Manufacturer Part Number=CQ06S4F1202T5E, Power=125mW, Supplier Part Number 1=CQ1206-12K-1%, Tolerance=1%, Voltage=200V, HelpURL=https://www.tme.eu/pl/Document/ec37243ca557adb02ebafc5c1ab83104/CQ%20datasheet.pdf, Part Number=R_10k_1206_1, SCH_Footprint=1206, Supplier 1=TME, Supplier 2="RS Components", Supplier 3=Farnell, Supplier 4=Mouser, Supplier 5=Digi-Key
R34 R35: library part R_10k_0603_1, Manufacturer=Vishay, Manufacturer Part Number=CRCW060310K0FKTABC, Power=100mW, Tolerance=1%, Voltage=75V, HelpURL=http://www.tme.eu/pl/Document/622e28308c06d160637f2b14751ba16b/Data%20Sheet%20CRCW_BCe3.pdf, Part Number=R_10k_0603_1, SCH_Footprint=0603, Supplier 1=TME, Supplier 2="RS Components", Supplier 3=Farnell, Supplier 4=Mouser, Supplier 5=Digi-Key, Supplier Part Number 1=CRCW060310K0FKTABC, Supplier Part Number 4=667-ERJ-3EKF1002V, Supplier Part Number 5=P10KGCT-ND
R36 R37: library part R_2k_0603, Manufacturer=Yageo, Manufacturer Part Number=RC0603FR-072KL, Power=100mW, Supplier Part Number 1=RC0603FR-072K, Tolerance=1%, HelpURL=http://datasheet.octopart.com/RC0603FR-072KL-Yageo-datasheet-8328172.pdf, Part Number=R_2k_0603, SCH_Footprint=0603, Supplier 1=TME, Supplier 2="RS Components", Supplier 3=Farnell, Supplier 4=Mouser, Supplier 5=Digi-Key, Supplier Part Number 3=1799328, Supplier Part Number 4=603-RC0603FR-072KL, Supplier Part Number 5=311-2.00KHRCT-ND
R51: library part R_22k_0402, Manufacturer=Panasonic, Manufacturer Part Number=ERA-2AEB223X, Power=63mW, Tolerance=1%, Voltage=50V, HelpURL=http://www.mouser.com/ds/2/315/AOA0000C237-1100991.pdf, Part Number=R_22k_0402, SCH_Footprint=0402, Supplier 1=TME, Supplier 2="RS Components", Supplier 3=Farnell, Supplier 4=Mouser, Supplier 5=Digi-Key, Supplier Part Number 2=566557, Supplier Part Number 3=1577719, Supplier Part Number 4=667-ERA-2AEB223X, Supplier Part Number 5=P22KDCCT-ND
R52: library part R_1M_0603_1, Manufacturer=Bourns, Manufacturer Part Number=CR0603-FX-1004ELF, Power=100mW, Tolerance=1%, Voltage=50V, HelpURL=https://datasheet.octopart.com/CR0603-FX-1004ELF-Bourns-datasheet-5318152.pdf, Part Number=R_1M_0603_1, SCH_Footprint=0603, Supplier 1=TME, Supplier 2="RS Components", Supplier 3=Farnell, Supplier 4=Mouser, Supplier 5=Digi-Key, Supplier Part Number 3=2321755, Supplier Part Number 4=652-CR0603FX-1004ELF, Supplier Part Number 5=CR0603-FX-1004ELFCT-ND
R53: library part R_100k_0603_1, Manufacturer=Royalohm, Manufacturer Part Number=0603SAF1003T5E, Power=100mW, Supplier Part Number 1=SMD0603-100K-1%, Tolerance=1%, Voltage=50V, HelpURL=http://www.tme.eu/pl/Document/b315665a56acbc42df513c99b390ad98/ROYALOHM-THICKFILM.pdf, Part Number=R_100k_0603_1, SCH_Footprint=0603, Supplier 1=TME, Supplier 2="RS Components", Supplier 3=Farnell, Supplier 4=Mouser, Supplier 5=Digi-Key, Supplier Part Number 4=667-ERJ-3EKF1003V, Supplier Part Number 5=P100KHCT-ND
U12: library part VL_LD1117AS33TR_3V3_1A2, "Low-Dropout Positive Voltage Regulator", Current=1A2, Manufacturer=STMicroelectronics, Supplier Part Number 1=LD1117AS33, Voltage=3.3V, HelpURL=http://www.tme.eu/pl/Document/bad00e7fc591b73ff810af309b2bb7a4/LD1117A.pdf, Manufacturer Part Number=LD1117AS33TR, Part Number=VL_LD1117AS33TR_3V3_1A2, SCH_Footprint=SOT223, Supplier 1=TME, Supplier 2="RS Components", Supplier 3=Farnell, Supplier 4=Mouser, Supplier 5=Digi-Key, Supplier Part Number 3=1467776, Supplier Part Number 4=LD1117AS33, Supplier Part Number 5=497-1228-1-ND
U21: "Module: combo; GPIO, I2C x2, I2S x2, SDIO, SPI x3, UART x3; 19.5dBm", Package="Module Olimex LTD", Availability=Unavailable, MF="Olimex LTD", MP=ESP-WROOM-32, Price=None, SnapEDA_Link=https://www.snapeda.com/parts/ESP-WROOM-32/Olimex%20LTD/view-part/?ref=snap

## Via types
v1: diameter 12, hole 8, Top Layer to Bottom Layer, 96 vias
v2: diameter 50, hole 28, Top Layer to Bottom Layer, 6 vias
v3: diameter 30, hole 12, Top Layer to Bottom Layer, 1 vias

## Nets (pads, with @x,y where several pads share a name; then routed paths per layer and width w, separated by ;. In a path a pad name is that pad's centre, name@x,y a point inside that pad or via, vN(x,y) a via of type N, cw(c..) or ccw(c..) an arc to the next point about the centre after c; other vN are vias at no path point)
3V3: C19.1 C21.1 D31.2 D32.2 P21.5 P22.7 P23.2 R22.2 R23.2 R35.2 U12.2 U12.4 U21.2 | length 4571.7
  Top Layer w12: v1(-697,512) -697,513 -627,443 -304.3,443 -158.3,589 v1(293,589) ; P22.7 -584.39,820 -529.91,765.53 -501.14,765.53 -455.37,719.76 v1(-455.37,706.37)
  Top Layer w14: v1(293,589) 293,557 330,520 P21.5
  Bottom Layer w12: D32.2 -1079,183.24 D31.2 ; v1(-455.37,706.37) -455.37,663.49 -446,654.12 -428.35,654.12 C21.1 ; v1(293,589) 293,622 311,640 U21.2 ; P21.5 552.25,520 R23.2 555,706.33 561,712.33 R22.2 ; U12.2@800,-8 860,-8 U12.4
  Bottom Layer w14: D31.2 -908.62,183.24 -843.11,248.75 -785.8,248.75 R35.2 -769.54,300 ; P22.7 -668,772 -668,541 -769.54,439.46 -769.54,300 ; P23.2 -560,140 -560,167.47 -587,194.47 -587,213.53 -586.53,214 -586.53,304.53 -593,311 -758.54,311 -769.54,300 ; P21.5 581.15,414.85 581.15,295.34 743.49,133 837.35,133 863,107.35 863,-5 860,-8 ; C19.1 712,-8 U12.2 U12.2@800,-8
+5: C16.1 C17.1 C18.1 C31.1 D17.2 D41.1 K41.1 L12.2 R15.1 U12.3 U31.8 | length 3431.2
  Top Layer w12: v1(-403,-7) -335.99,60.01 -335.99,192 -326.62,201.37 -251.63,201.37 -250,203 -248.37,201.37 -57.46,201.37 -48.09,192 -48.09,99.25 7.16,44 118.84,44 127.84,53 v1(176,53) ; v2(557,-371) 557,-344 595,-306 835,-306 L12.2
  Bottom Layer w12: -625,-1 -505.39,-1 -498.86,5.53 -461.14,5.53 -448.61,-7 v1(-403,-7) ; v1(176,53) 229.17,53 287,-4.83 C16.1 310,-203 D17.2 556,-372 v2(557,-371)
  Bottom Layer w14: C31.1@-642,81 -625,64 -625,-1 U31.8 ; C16.1 337,-153 476,-153 491,-138 491,-64 537,-18 537,66 D41.1 ; C17.1 391.35,-497.39 R15.1 479,-409.75 D17.2 ; K41.1 548,195.9 D41.1 ; U12.3 758.57,109 703.35,109 C18.1 583.35,112.35 D41.1
EN: C22.1 P21.1 P22.3 | length 1496.8
  Top Layer w10: v1(-445,774) -445.72,774 -376.51,704.79 355.34,704.79 370.54,720 v1(430,720)
  Bottom Layer w10: P22.3 -564.53,675.47 -564.53,738.44 -534.97,768 -451,768 v1(-445,774) ; v1@431.47,720.29 431.47,838.44 476,882.97 P21.1 501.65,894.35 C22.1
GND: C11.2 C12.2 C13.2 C15.2 C16.2 C17.2 C18.2 C19.2 C21.2 C31.2 C32.2 D13.2 D14.2 D15.2 P21.2 P22.2 P23.3 Q11.2 Q41.2 R13.1 R14.1 R15.2 R21.1 R34.1 R37.1 R42.1 U12.1 U21.1 U21.1.1 U21.15 U21.38 U31.5 | length 2001.8
  Bottom Layer w10: R37.1 -808.54,8 C32.2 ; D14.2 -775.75,-524.75 -508.25,-524.75 D13.2 -275,-581 D15.2 ; C31.2@-776,81 -776,16.65 C32.2 ; U31.5 -767.35,-35.01 C32.2 ; R34.1 -743,189.46 v1(-743,183.24) ; C21.2 -369.65,680.35 U21.38 ; Q11.2 159.45,-367.95 159.45,-326.47 C13.2 132.85,-321 C11.2 167,-207.15 C16.2 ; v1(273,-477) 256.75,-493.25 R13.1 R14.1 ; C17.2 362.25,-532.39 R15.2 ; C18.2 632,13.65 632,-64 C19.2 691.45,-98.55 U12.1 ; v1(756,281) 738.25,281 R21.1 730.57,281.25 714.14,297.68 714.14,312.75 R42.1 690,335.08 679.61,345.48 679.61,413.02 688.39,421.81 766.19,421.81 790,398 Q41.2@790,363.5
  other v1: -950.08,-604.8 112.91,-604.8 231.02,-604.8 585.35,-604.8 703.46,-604.8 821.57,-604.8 939.68,-604.8 -1009.13,-486.69 -891.02,-486.69 -182.36,-486.69 526.3,-486.69 762.52,-486.69 880.63,-486.69 998.74,-486.69 -1068.19,-368.58 821.57,-368.58 1057.79,-368.58 -182.36,-250.47 53.86,-250.47 644.41,-250.47 762.52,-250.47 880.63,-250.47 998.74,-250.47 231.02,-132.36 939.68,-132.36 649,18 -950.08,103.87 1057.79,103.87 -536.69,221.98 53.86,221.98 762.52,221.98 880.63,221.98 -1068.19,340.09 -950.08,340.09 -477.64,340.09 -241.42,340.09 -123.31,340.09 231.02,340.09 1057.79,340.09 -1009.13,458.2 -891.02,458.2 -182.36,458.2 171.97,458.2 290.08,458.2 644.41,458.2 762.52,458.2 880.63,458.2 998.74,458.2 -950.08,576.31 -831.97,576.31 -713.86,576.31 -595.75,576.31 585.35,576.31 703.46,576.31 821.57,576.31 939.68,576.31 -891.02,694.42 -772.91,694.42 644.41,694.42 762.52,694.42 880.63,694.42 -713.86,812.53 585.35,812.53 703.46,812.53 -654.8,930.64 -536.69,930.64 -418.58,930.64 408.19,930.64 526.3,930.64 644.41,930.64
GND1: C52.2 P01.3 R52.1 R53.1 U51.2 U51.6 | length 595.5
  Top Layer w10: P01.3 0,-1132 61,-1193 61,-1213.46 R52.1 84.43,-1218 101,-1234.57 101,-1258.19 v1(100,-1259.19)
  Bottom Layer w10: R53.1 19.43,-1456.03 19.43,-1416.77 U51.2 42.57,-1393.62 42.57,-1383.24 68.4,-1357.41 U51.6 66.35,-1302.76 C52.2 65.54,-1259.19 v1(100,-1259.19)
GPIO0: D21.2 P22.6 R23.1 R41.1 U21.25 | length 2186.1
  Top Layer w10: P22.6 -520,682.97 -564.53,638.44 -564.53,601.56 -538.44,575.47 -500.47,575.47 v1(-430,505) ; v1(291,316) 293,314 510,314 v1(622,426)
  Bottom Layer w10: v1(-430,505) -430,70 -400,40 U21.25 -342.72,57.28 -283.29,57.28 -271.17,69.41 -6.18,69.41 194.41,270 245,270 v1(291,316) ; R23.1 556.75,491.25 v1(622,426) 621.77,425.77 D21.2 637,364.02 R41.1
GPIO2: P22.4 U21.24 | length 960
  Top Layer w10: v1(-564,204) -524.53,164.53 -524.53,41.56 -487.5,4.53 -461.56,4.53 -435,-22.03 -435,-29.57 -417.57,-47 -372.43,-47 -347.43,-22 v1(-267,-22)
  Bottom Layer w10: v1(-564,204) -564.53,204.53 -564.53,575.47 P22.4 ; v1(-267,-22) -233.61,-22 U21.24
GPIO14: U21.13 | length 69.4
  Bottom Layer w10: U21.13 348.66,107.28 388.34,107.28 397.13,116.07
NetC01_1: C01.1 F11.1 J01.1 | length 473.3
  Top Layer w30: J01.1 -393.7,-740 F11.1 -250.67,-720 C01.1@-98.43,-720
NetC01_2: C01.2 C02.2 J01.3 J02.3 | length 1099.1
  Top Layer w30: C02.2 98.43,-720 -41.57,-860 -113.7,-860 -113.7,-915.3 -69,-960 416.85,-960 J02.3
NetC02_1: 
NetC11_1: C11.1 D11.1 D12.1 L11.1 | length 1098.5
  Top Layer w30: v2@-465,-646 -465,-546 L11.1
  Top Layer w50: L11.1 -394,-607 50,-607 50,-521 C11.1
  Bottom Layer w30: D12.1 D11.1 -579,-621 -539,-661 v2(-463,-661)
NetC12_1: C12.1 L11.2 U11.3 | length 820.9
  Top Layer w30: L11.2 -438.35,-228 v2(-252,-228)
  Top Layer w50: C12.1 -838,171.65 L11.2
  Bottom Layer w30: v2(-252,-228) -252,-236 -251,-237 -251.16,-237.16 U11.3
NetC13_1: C13.1 Q11.3 U11.2 | length 694.7
  Bottom Layer w10: U11.2 -149.34,-378 -69.38,-298.04 27.69,-298.04 36.48,-306.83 36.48,-327.48 117,-408 Q11.3 242,-378.32 C13.1
NetC14_1: C14.1 U11.1 | length 227.1
  Bottom Layer w10: U11.1 -65.58,-464.61 C14.1
NetC14_2: C14.2 D15.1 L12.1 U11.4 | length 1209.7
  Bottom Layer w10: U11.4 -20.84,-466.88 -10.96,-476.76 -10.96,-488.53 C14.2 -10.96,-494 -10.96,-511.24 -85.72,-586 -26.72,-645 503,-645 722.15,-425.85 L12.1
NetC15_1: C15.1 D16.1 D17.1 R14.2 | length 1414.4
  Top Layer w10: C15.1 -192.04,-133.96 -47,-279 25,-279 114,-368 v1(308,-368)
  Bottom Layer w10: v1(308,-368) D16.1 ; D16.1@337,-374 D16.1 ; D17.1 479,-625 327,-625 327,-515.25 325.75,-514 R14.2 325.75,-481 329.71,-481 338.5,-472.21 338.5,-411.5 343,-407 D16.1
NetC22_2: C22.2 R22.1 U21.3 | length 416.9
  Bottom Layer w10: U21.3 406.91,590 431.47,614.56 431.47,638.44 457.56,664.53 483.5,664.53 537.14,718.17 537.14,765.07 553.57,781.5 R22.1 557,785.5 C22.2
NetC32_1: C32.1 U31.6 | length 55.5
  Bottom Layer w10: C32.1 -725,-3.65 U31.6
NetC51_1: C51.1 R51.2 U51.3 | length 152.3
  Top Layer w10: v1(-6,-1373) 7,-1360 R51.2
  Bottom Layer w10: C51.1 -44.24,-1367.35 U51.3 -6.4,-1373.4 v1(-6,-1373)
NetC51_2: C51.2 R52.2 U51.4 | length 157.1
  Top Layer w10: v1(-7,-1272) -7,-1233.46 R52.2
  Bottom Layer w10: C51.2 -40,-1336.65 -40,-1333.43 -11.37,-1304.8 U51.4 -6.4,-1272.6 v1(-7,-1272)
NetC52_1: C52.1 P01.2 U51.5 | length 252
  Bottom Layer w10: P01.2 7.65,-1232 C52.1 35.65,-1300.16 U51.5
NetD11_2: D11.2 D13.1 K41.3 R31.1 U31.1 U31.2 | length 2583.2
  Top Layer w50: v2(-27,-122) 173,-122 397,102 878.42,102 K41.3
  Bottom Layer w30: R31.1@-874,-228 R31.1 -838.76,-180.76 -658.4,-180.76 -625,-214.16 U31.1 -625,-349 ; U31.2 -675,-299 -625,-349 ; D13.1 -571,-403 D11.2 -625,-349
  Bottom Layer w50: D13.1 -384,-403 -334.23,-353.23 -334.23,-158.23 -298,-122 v2(-27,-122)
NetD12_2: C02.1 D12.2 D14.1 J01.2 J02.2 R11.1 R32.1 | length 2107.6
  Top Layer w30: v2(-633,-472) -633,-474 -622,-485 v2(-622,-741) ; J02.2 378.43,-801.57 C02.1
  Bottom Layer w30: R32.1 -864,-403 D14.1 -702,-403 v2(-633,-472) ; R11.1 -622,-777.43 v2(-622,-741)
  Bottom Layer w40: v2(-622,-741) -619,-744 -432.85,-744 J01.2 -221.61,-955.24 59.11,-955.24 59.61,-955.75 236,-955.75 320,-871.75 J02.2
NetD16_2: D16.2 R12.2 R13.2 | length 285
  Top Layer w10: v1(305.5,-417) 305.5,-416.5 306,-416 v1(381,-416)
  Bottom Layer w10: R12.2 R13.2 225.25,-487.57 264.82,-448 305.5,-448 v1(305.5,-417) ; D16.2@380.5,-448 380.5,-416.5 v1(381,-416)
NetD21_1: D21.1 R21.2 | length 74.7
  Bottom Layer w10: D21.1 738,359.48 R21.2
NetD31_1: D31.1 R31.2 R33.2 U21.10 | length 1635.9
  Bottom Layer w30: D31.1 -1002,62 -917,-23 R33.2 -886,-33 R31.2 -406.15,-108 -258.74,39.41 6.25,39.41 206.84,240 U21.10
NetD32_1: D32.1 R32.2 R33.1 R34.2 R35.1 U21.11 | length 2096.3
  Top Layer w30: v1(-1117,86) -931,272 v1(-649,272) -84.25,272 -5.19,192.94 -5.19,100.19 20,75 v1(106,75)
  Bottom Layer w30: v1(-1117,86) -1083.76,86 D32.1 -1080,11 -1038,-31 R32.2 ; R34.2 R35.1 -705.46,272 v1(-649,272) ; v1(106,75) 221,190 U21.11
NetD41_2: D41.2 K41.2 Q41.3 | length 1393.5
  Bottom Layer w10: K41.2 548,-220.54 D41.2 615,-168 1051,-168 1106,-113 1106,182 1079,209 1079,269 1022,326 Q41.3@870,326
NetF11_1: 
NetF11_2: F11.2 R11.2 U31.3 U31.4 | length 650.5
  Top Layer w30: v3(-749,-307) -749,-720.33 F11.2
  Bottom Layer w30: U31.4 -775,-281 v3(-749,-307) -725,-283 U31.3 ; F11.2 -729.33,-812.1 R11.2
NetJ02_1: 
NetK41_4: J02.1 K41.4 | length 1007.5
  Top Layer w50: J02.1 171,-860 280,-751 280,-627 441.26,-465.74 K41.4
NetP01_1: 
NetP01_2: 
NetP01_3: 
NetQ11_1: Q11.1 R12.1 | length 53.5
  Bottom Layer w10: R12.1 159.89,-487.36 159.89,-447.61 Q11.1
NetQ41_1: Q41.1 R41.2 R42.2 | length 191.6
  Bottom Layer w10: R41.2 R42.2 702.28,281.25 714.14,269.39 714.14,266.18 722.93,257.39 782.75,257.39 782.75,281.25 Q41.1@790,288.5
NetR36_1: R36.1 U31.7 | length 211.6
  Bottom Layer w10: R36.1 -705,144.54 -705,-10.31 -675,-40.31 U31.7
NetR36_2: R36.2 R37.2 | length 99.3
  Bottom Layer w10: R37.2 -833.72,107.54 -788.27,153 R36.2
NetR51_1: R51.1 TB51.1 | length 309.3
  Top Layer w10: R51.1 221,-1360 TB51.1
NetR53_2: P01.1 R53.2 U51.1 | length 368.7